# Altium PCB Twintig-USB.PcbDoc
Units mm, origin at the board's own origin, x right, y up, seen from the top; angles counter-clockwise.
Board outline 15 x 20 mm, 4 copper layers (Top Layer, Int1 (GND), Int2 (PWR), Bottom Layer), stack 1.369 mm thick; 20 components, 19 nets, 79 pads, 42 vias.
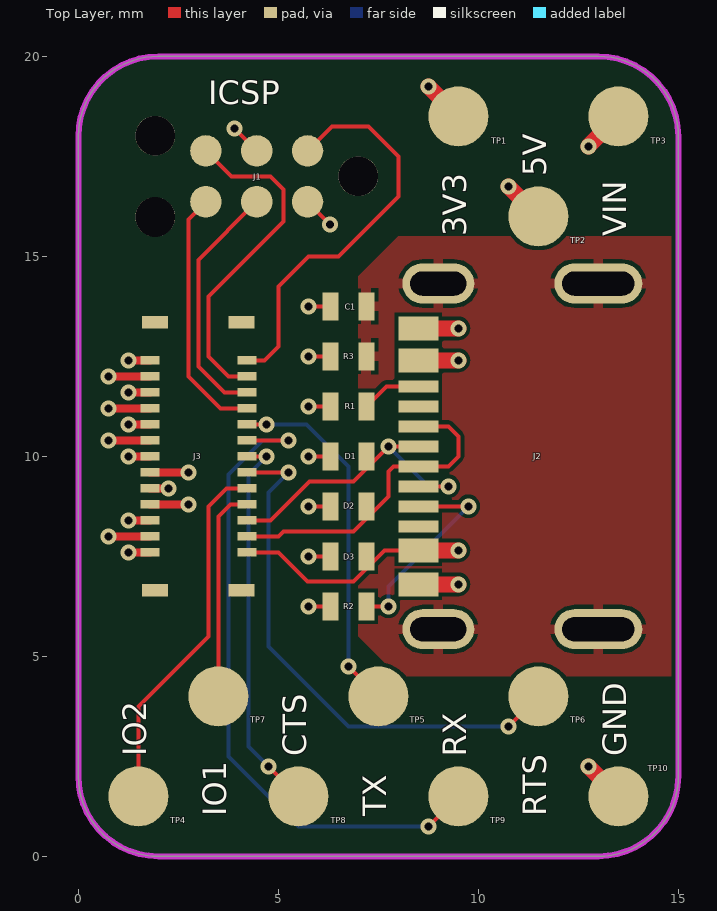
[diagram p0: Top Layer view]
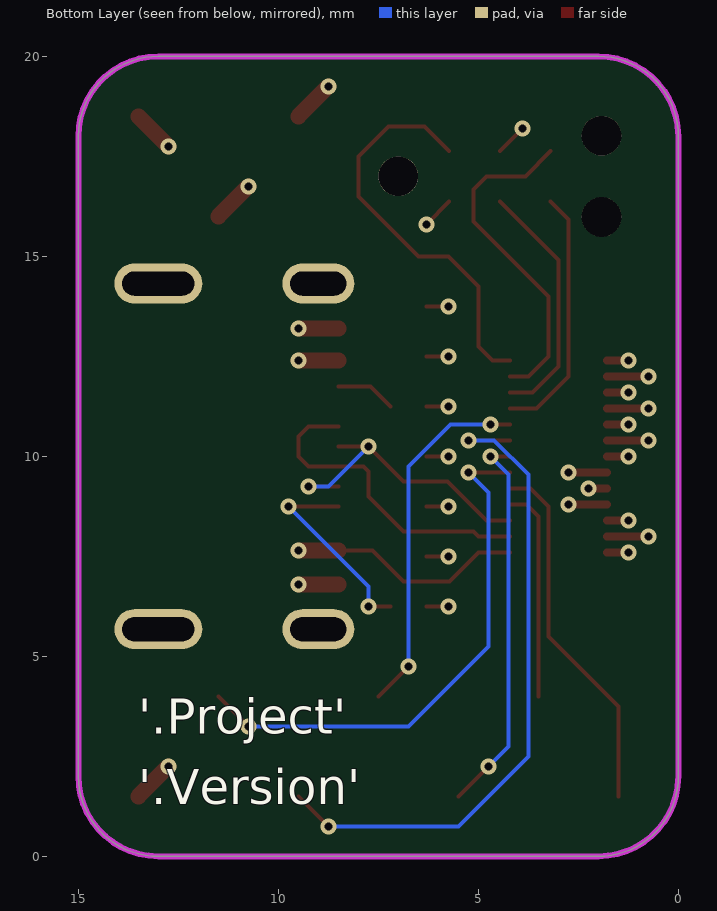
[diagram p1: Bottom Layer view, seen from below]
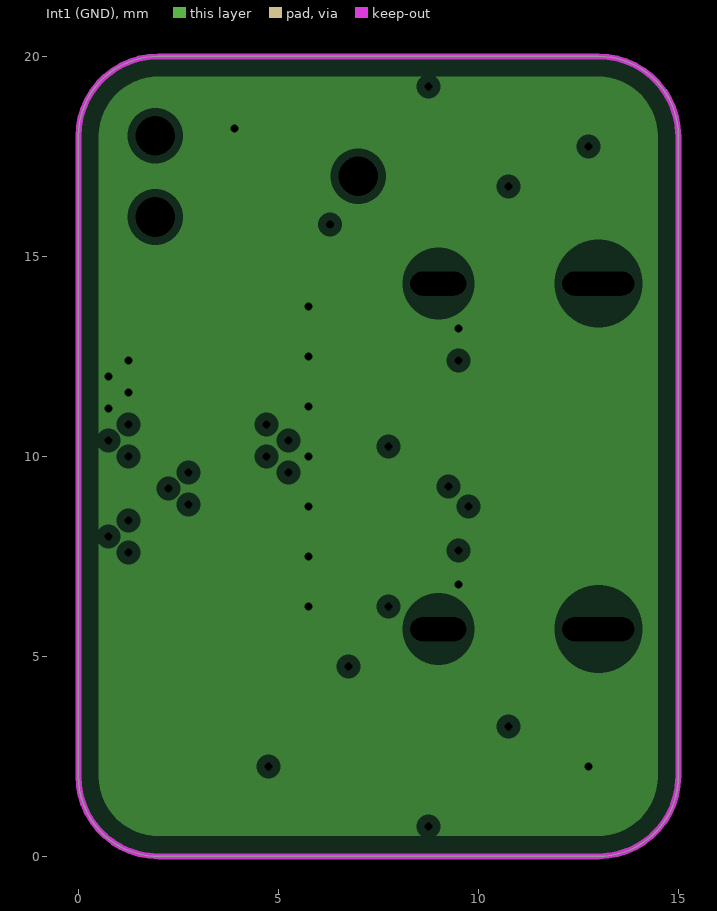
[diagram p2: Int1 (GND), clearances drawn from the general rule]
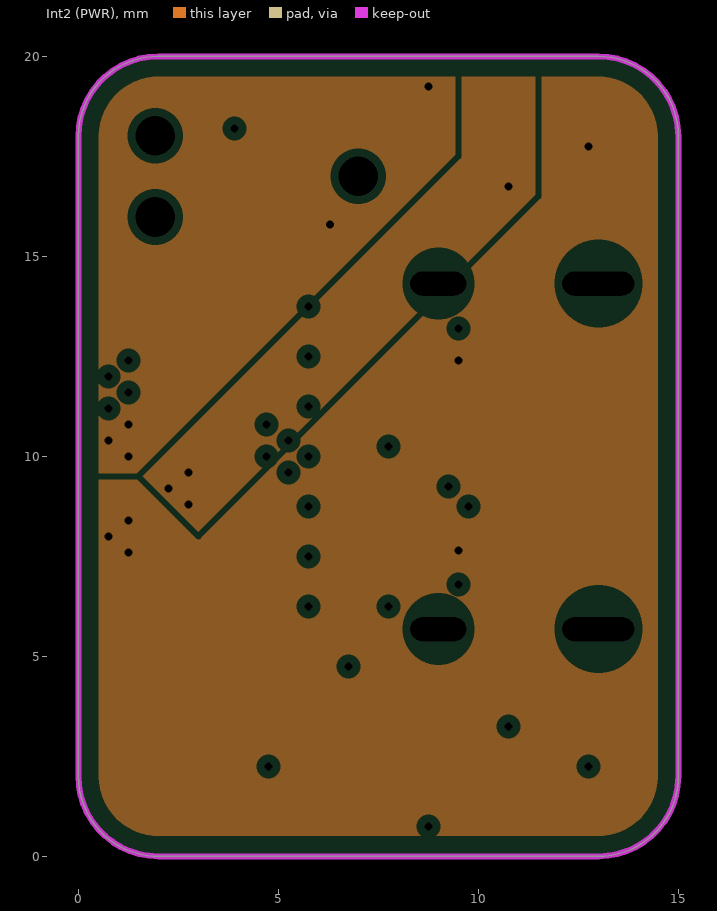
[diagram p3: Int2 (PWR), clearances drawn from the general rule]
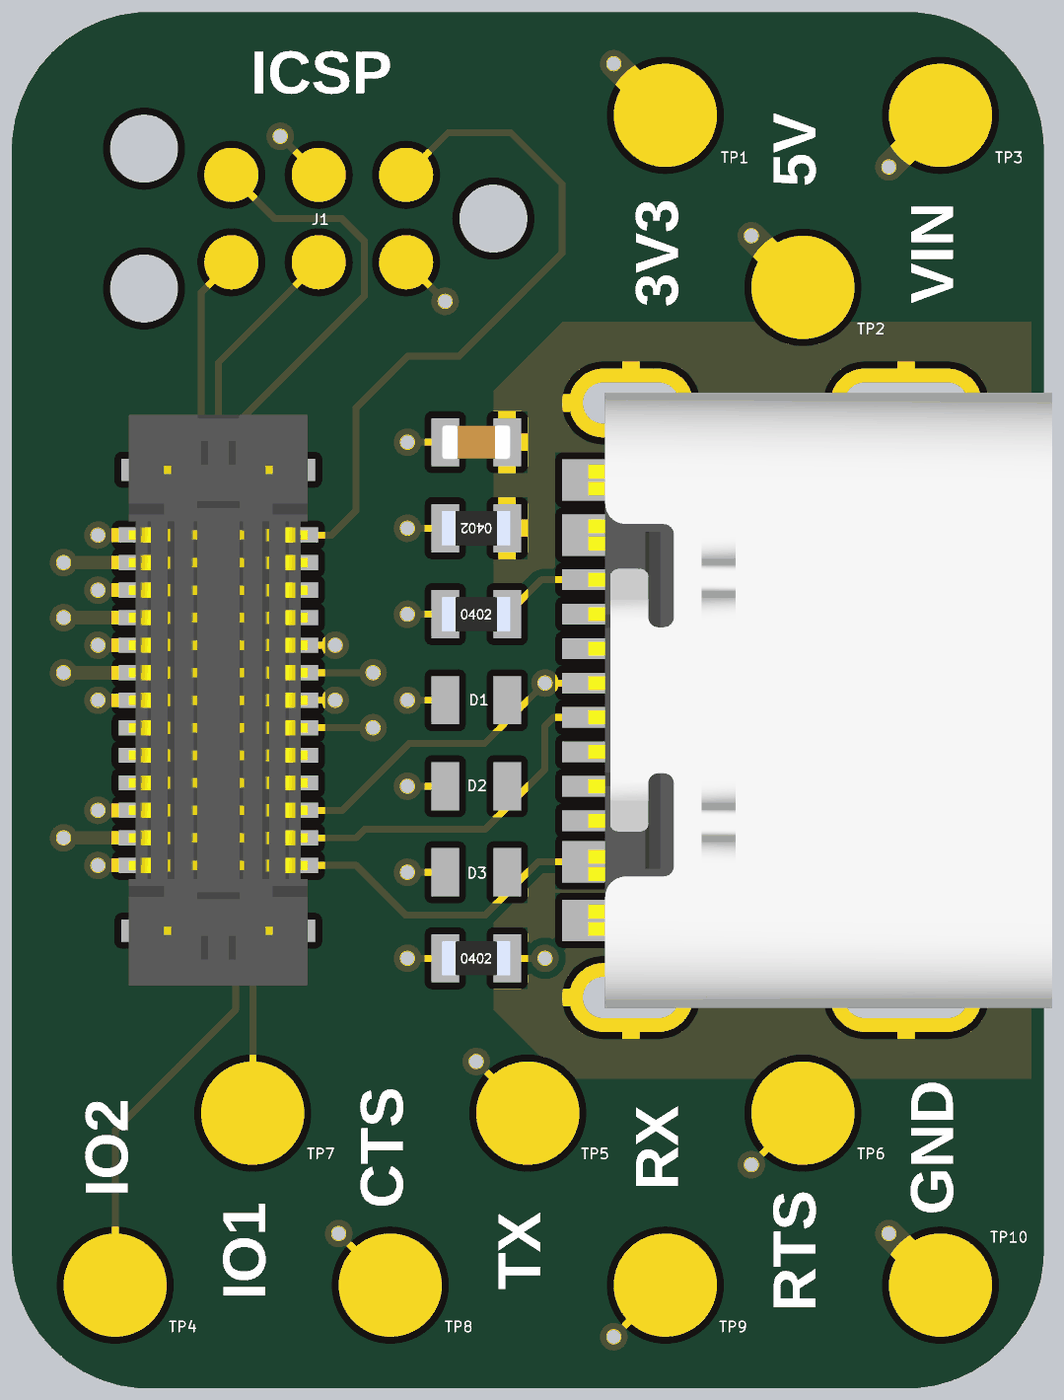
[diagram p4: 3D render of the assembled board from above, using the file's embedded part models]

## Layer stack, top to bottom
Top Solder: solder mask 0.0254, SM-001, Dk 4
Top Layer: signal copper 0.035
Dielectric 1: prepreg 0.1295, PP-017, Dk 4.3
Dielectric 2: prepreg 0.1295, PP-017, Dk 4.3
Int1 (GND): plane copper 0.035, net GND
Dielectric 3: core 0.7112, Core-039, Dk 4.8
Int2 (PWR): plane copper 0.035, net VIN
Dielectric 4: prepreg 0.1295, PP-017, Dk 4.3
Dielectric 5: prepreg 0.1295, PP-017, Dk 4.3
Bottom Layer: signal copper 0.035
Bottom Solder: solder mask 0.0254, SM-001, Dk 4

## Board outline
2,0 cw(c2,2) 0,2 0,18 cw(c2,18) 2,20 13,20 cw(c13,18) 15,18 15,2 cw(c13,2) 13,0

## Design rules (kind name [scope] priority, off if disabled: settings)
Clearance [All] p1: gap=0.1 ignorepadtopadclearanceinfootprint=FALSE except(0: Arc-Hole Track-Hole SMDPad-Hole THPad-Hole Via-Hole Fill-Hole Poly-Hole Region-Hole Text-Hole)
DiffPairsRouting [All] p1: maxlimit=0.254 minlimit=0.1 mostfreqgap=0.1 toplayer_minwidth=0.1 toplayer_maxwidth=0.381 toplayer_prefwidth=0.1 bottomlayer_minwidth=0.1 bottomlayer_maxwidth=0.381 bottomlayer_prefwidth=0.1 maxuncoupledlength=12.7
HoleSize [All] p1: absolutevalues=TRUE maxlimit=10 minlimit=0.025 maxpercent=80.000 minpercent=20.000
MinimumSolderMaskSliver [All] p1: minsoldermaskwidth=0
PlaneClearance [All] p1: clearance=0.2
PlaneConnect [All] p1: planeconnectstyle=Direct reliefexpansion=0.508 reliefentries=4 reliefconductorwidth=0.254 reliefairgap=0.254
PolygonConnect [All] p1: thpad.connectstyle=Relief thpad.reliefconductorwidth=0.254 thpad.reliefentries=4 thpad.polygonreliefangle="90 Angle" thpad.airgapwidth=0.1 smdpad.connectstyle=Relief smdpad.reliefconductorwidth=0.254 smdpad.reliefentries=4 smdpad.polygonreliefangle="90 Angle" smdpad.airgapwidth=0.1 via.connectstyle=Direct via.reliefconductorwidth=0.254 via.reliefentries=4 via.polygonreliefangle="90 Angle" via.airgapwidth=0.254
RoutingVias [All] p1: holewidth=0.711 width=1.27 viastyle="Through Hole" minholewidth=0.15 minwidth=0.35 maxholewidth=0.711 maxwidth=1.27
SilkToSolderMaskClearance [IsPad] p1: minsilkscreentomaskgap=0.1 clearancetoexposedcopper=TRUE
SolderMaskExpansion [All] p1: expansion=0.102 istentingtop=FALSE
SupplyNets "Schematic Supply Nets_4" [InNet('3.3V')] p1: voltage=0.000
SupplyNets "Schematic Supply Nets_3" [InNet('VIN')] p2: voltage=0.000
SupplyNets "Schematic Supply Nets_2" [InNet('GND')] p3: voltage=0.000
SupplyNets "Schematic Supply Nets_1" [InNet('5V')] p4: voltage=0.000
SupplyNets "Schematic Supply Nets" [InNet('SHELL')] p5: voltage=0.000
Width [All] p1: maxlimit=1 minlimit=0.05 preferedwidth=0.1
24 further rules are at their usual default settings.

## Classes and differential pairs
differential pair D: +D_P -D_N

## Components (designator, comment, footprint, x,y, rotation, side; value= is the part's Value field where it differs from the comment)
C1 "4.7nF" "CAPACITOR 0402" 6.75,13.75 r180 top
D1 "SP0402B-ULC-01ETG" "DIODE TVS 0402" 6.75,10 r180 top
D2 "SP0402B-ULC-01ETG" "DIODE TVS 0402" 6.75,8.75 r180 top
D3 "SP0402B-ULC-01ETG" "DIODE TVS 0402" 6.75,7.5 r180 top
J1 "DNP" "TAG CONNECT NO LEGS" 7,17 r180 top
J2 "Molex 217179-0001" "MOLEX 217179-0001" 13,10 r90 top
J3 "Molex 502426-2630" "MOLEX 502426-2630" 3,10 r270 top
R1 "5.1kR" "RESISTOR 0402" 6.75,11.25 r0 top
R2 "5.1kR" "RESISTOR 0402" 6.75,6.25 r0 top
R3 "1MR" "RESISTOR 0402" 6.75,12.5 r180 top
TP1 "Test Point" "TEST POINT 1.5MM" 9.5,18.5 r90 top
TP2 "Test Point" "TEST POINT 1.5MM" 11.5,16 r90 top
TP3 "Test Point" "TEST POINT 1.5MM" 13.5,18.5 r90 top
TP4 "Test Point" "TEST POINT 1.5MM" 1.5,1.5 r90 top
TP5 "Test Point" "TEST POINT 1.5MM" 7.5,4 r90 top
TP6 "Test Point" "TEST POINT 1.5MM" 11.5,4 r90 top
TP7 "Test Point" "TEST POINT 1.5MM" 3.5,4 r90 top
TP8 "Test Point" "TEST POINT 1.5MM" 5.5,1.5 r90 top
TP9 "Test Point" "TEST POINT 1.5MM" 9.5,1.5 r90 top
TP10 "Test Point" "TEST POINT 1.5MM" 13.5,1.5 r90 top

## Footprints (in the part's own frame and the unit in brackets; to place one, negate y for a bottom-side part, rotate by r counter-clockwise, add the part's x,y. Pads: shape width x height; smd on the part's side, far side on the other; paste and mask are expansions set on the pad)
"CAPACITOR 0402" [mm]
  rect 0.4x0.7 smd: 1(-0.45,0) 2(0.45,0)
  body extent -0.5,-0.25 0.5,0.25, height 0.48
"DIODE TVS 0402" [mm]
  rect 0.4x0.7 smd: 1(-0.45,0) 2(0.45,0)
  body extent -0.5,-0.3 0.5,0.3, height 0.4
"MOLEX 217179-0001" [mm]
  rect 0.6x1 smd: "A1 B12"(-3.2,4.5) "A4 B9"(-2.35,4.5) "B1 A12"(3.2,4.5) "B4 A9"(2.4,4.5)
  rect 0.3x1 smd: A5(-1.25,4.5) A6(-0.25,4.5) A7(0.25,4.5) A8(1.25,4.5) B5(1.75,4.5) B6(0.75,4.5) B7(-0.75,4.5) B8(-1.75,4.5)
  oval 1x2.2 hole 0.6 slot 1.8 at 90 deg: Shell(-4.32,0) Shell(4.32,0)
  oval 1x1.8 hole 0.6 slot 1.4 at 90 deg: Shell(-4.32,4) Shell(4.32,4)
  body extent -4.47,-2.13 4.47,4.63, height 3.27
"MOLEX 502426-2630" [mm]
  rect 0.22x0.475 smd: 1(-2.4,-1.212) 2(-2,-1.212) 3(-1.6,-1.212) 4(-1.2,-1.212) 5(-0.8,-1.212) 6(-0.4,-1.212) 7(0,-1.212) 8(0.4,-1.212) 9(0.8,-1.212) 10(1.2,-1.212) 11(1.6,-1.212) 12(2,-1.212) 13(2.4,-1.212) 14(-2.4,1.212) 15(-2,1.212) 16(-1.6,1.212) 17(-1.2,1.212) 18(-0.8,1.212) 19(-0.4,1.212) 20(0,1.212) 21(0.4,1.212) 22(0.8,1.212) 23(1.2,1.212) 24(1.6,1.212) 25(2,1.212) 26(2.4,1.212)
  rect 0.32x0.65 smd: Nail(-3.35,-1.085) Nail(-3.35,1.085) Nail(3.35,-1.085) Nail(3.35,1.085)
  body extent -4.15,-1.3 4.15,1.3, height 0.98
"RESISTOR 0402" [mm]
  rect 0.4x0.7 smd: 1(-0.45,0) 2(0.45,0)
  body extent -0.5,-0.25 0.5,0.25, height 0.34
"TAG CONNECT NO LEGS" [mil]
  round 31 smd paste-99999: 1(50,-25) 2(50,25) 3(100,-25) 4(100,25) 5(150,-25) 6(150,25)
  round 39 hole 39 unplated: Pin(0,0) Pin(200,-40) Pin(200,40)
"TEST POINT 1.5MM" [mm]
  round 1.5 smd paste-100: 1(0,0)

## Part data
C1: library part Capacitor
D1 D2 D3: library part "Diode TVS"
J1: library part "MPLAB ICSP"
J2: library part "USB-C Receptacle (16 Pin)"
R1 R2 R3: library part Resistor

## Via types
v1: diameter 0.4, hole 0.2, Top Layer to Bottom Layer, tented both sides, 42 vias

## Nets (pads, with @x,y where several pads share a name; then routed paths per layer and width w, separated by ;. In a path a pad name is that pad's centre, name@x,y a point inside that pad or via, vN(x,y) a via of type N, cw(c..) or ccw(c..) an arc to the next point about the centre after c; other vN are vias at no path point)
3.3V: J1.2 J3.5 J3.6 J3.7 TP1.1 | length 4
  Top Layer w0.1: J1.2 v1(6.298,15.797)
  Top Layer w0.2: v1(0.75,10.4) J3.6 ; v1(1.25,10) J3.7 ; v1(1.25,10.8) J3.5
  Top Layer w0.4: v1(8.75,19.25) TP1.1
5V: J3.8 J3.9 J3.10 TP2.1 | length 3.4
  Top Layer w0.2: J3.10 v1(2.75,8.8) ; J3.9 v1(2.25,9.2) ; J3.8 v1(2.75,9.6)
  Top Layer w0.4: v1(10.75,16.75) TP2.1
CC1: J2.A5 R2.2 | length 5.1
  Top Layer w0.1: R2.2 v1(7.75,6.25) ; J2.A5 v1(9.75,8.75)
  Bottom Layer w0.1: v1(7.75,6.25) 7.75,6.75 v1(9.75,8.75)
CC2: J2.B5 R1.2 | length 1.5
  Top Layer w0.1: R1.2 7.7,11.75 J2.B5
CTS: J3.20 TP8.1 | length 9.7
  Top Layer w0.1: J3.20 v1(4.7,10) ; v1(4.75,2.25) TP8.1
  Bottom Layer w0.1: v1(4.7,10) 4.25,9.55 4.25,2.75 v1(4.75,2.25)
D_N: D1.1 J2.A7 J2.B7 J3.24 | length 7.7
  Top Layer w0.1: J3.24 4.8,8.4 5.439,9.039 5.775,9.375 6.875,9.375 7.275,9.775 v1(7.75,10.25) J2.A7 ; J2.B7 v1(9.25,9.25)
  Bottom Layer w0.1: v1(7.75,10.25) 8.75,9.25 v1(9.25,9.25)
D_P: D2.1 J2.A6 J2.B6 J3.25 | length 8.1
  Top Layer w0.1: J3.25 5,8 5.125,8.125 6.875,8.125 7.275,8.525 7.75,9 7.75,9.625 7.875,9.75 J2.A6 9.25,9.75 9.5,10 9.5,10.5 9.25,10.75 J2.B6
Debug: J1.6 J3.17 | length 6.3
  Top Layer w0.1: J1.6 2.75,15.925 2.75,12 3.55,11.2 J3.17
GND: "J2.A1 B12" "J2.B1 A12" C1.2 D1.2 D2.2 D3.2 J1.3 J3.1 J3.2 J3.3 J3.4 R1.1 R2.1 R3.2 TP10.1 | length 10.9
  Top Layer w0.1: v1(3.9,18.195) J1.3 ; v1(5.75,6.25) R2.1 ; v1(5.75,7.5) D3.2 ; v1(5.75,8.75) D2.2 ; v1(5.75,10) D1.2 ; v1(5.75,11.25) R1.1 ; v1(5.75,12.5) R3.2 ; v1(5.75,13.75) C1.2
  Top Layer w0.2: v1(0.75,11.2) J3.4 ; v1(0.75,12) J3.2 ; v1(1.25,11.6) J3.3 ; v1(1.25,12.4) J3.1
  Top Layer w0.4: 8.5,6.8 v1(9.5,6.8) ; 8.5,13.2 v1(9.5,13.2) ; v1(12.75,2.25) TP10.1
"GPIO 1": J3.23 TP7.1 | length 5.3
  Top Layer w0.1: TP7.1 3.5,8.5 3.8,8.8 J3.23
"GPIO 2": J3.22 TP4.1 | length 9.1
  Top Layer w0.1: TP4.1 1.5,3.75 3.25,5.5 3.25,8.75 3.7,9.2 J3.22
MCLR: J1.1 J3.14 | length 10.2
  Top Layer w0.1: J3.14 4.65,12.4 5,12.75 5,14.25 5.75,15 6.5,15 8,16.5 8,17.5 7.25,18.25 6.345,18.25 J1.1
PGEC: J1.5 J3.15 | length 8.5
  Top Layer w0.1: J1.5 3.825,17 4.8,17 5.125,16.675 5.125,15.875 3.25,14 3.25,12.5 3.75,12 J3.15
PGED: J1.4 J3.16 | length 6.2
  Top Layer w0.1: J3.16 3.65,11.6 3,12.25 3,14.905 J1.4
RTS: J3.21 TP6.1 | length 13.5
  Top Layer w0.1: J3.21 v1(5.25,9.6) ; v1(10.75,3.25) TP6.1
  Bottom Layer w0.1: v1(5.25,9.6) 4.75,9.1 4.75,5.25 6.75,3.25 v1(10.75,3.25)
RX: J3.19 TP9.1 | length 16.7
  Top Layer w0.1: J3.19 v1(5.25,10.4) ; v1(8.75,0.75) TP9.1
  Bottom Layer w0.1: v1(5.25,10.4) 4.605,10.4 3.75,9.545 3.75,2.5 5.5,0.75 v1(8.75,0.75)
SHELL: C1.1 J2.Shell R3.1
TX: J3.18 TP5.1 | length 9
  Top Layer w0.1: J3.18 v1(4.7,10.8) ; v1(6.75,4.75) TP5.1
  Bottom Layer w0.1: v1(4.7,10.8) 5.7,10.8 6.75,9.75 v1(6.75,4.75)
VIN: "J2.A4 B9" "J2.B4 A9" D3.1 J3.11 J3.12 J3.13 J3.26 TP3.1 | length 10.1
  Top Layer w0.1: J3.26 5,7.6 5.725,6.875 6.875,6.875 7.65,7.65 8.5,7.65
  Top Layer w0.2: v1(0.75,8) J3.12 ; v1(1.25,7.6) J3.13 ; v1(1.25,8.4) J3.11
  Top Layer w0.4: 8.5,7.65 v1(9.5,7.65) ; 8.5,12.4 v1(9.5,12.4) ; v1(12.75,17.75) TP3.1
pads on no net: J1.Pin J2.A8 J2.B8 J3.Nail

## Polygon pours and split planes (outlines as drawn)
SHELL on Top Layer "SHELL_L01_P000" (solid, pour order 0): 15,15.5 8,15.5 7,14.5 7,5.5 8,4.5 15,4.5
GND on Int1 (GND) (split plane): 2,19.49 13,19.49 13.015,19.491 13.167,19.482 13.332,19.454 13.493,19.408 13.647,19.344 13.794,19.263 13.93,19.166 14.055,19.055 14.166,18.93 14.263,18.794 14.344,18.647 14.408,18.493 14.454,18.332 14.482,18.167 14.491,18.015 14.49,18 14.49,2 14.491,1.985 14.482,1.833 14.454,1.668 14.408,1.507 14.344,1.353 14.263,1.206 14.166,1.07 14.055,0.945 13.93,0.834 13.794,0.737 13.647,0.656 13.493,0.592 13.332,0.546 13.167,0.518 13.015,0.509 13,0.51 2,0.51 1.985,0.509 1.833,0.518 1.668,0.546 1.507,0.592 1.353,0.656 1.206,0.737 1.07,0.834 0.945,0.945 0.834,1.07 0.737,1.206 0.656,1.353 0.592,1.507 0.546,1.668 0.518,1.833 0.509,1.985 0.51,2 0.51,18 0.509,18.015 0.518,18.167 0.546,18.332 0.592,18.493 0.656,18.647 0.737,18.794 0.834,18.93 0.945,19.055 1.07,19.166 1.206,19.263 1.353,19.344 1.507,19.408 1.668,19.454 1.833,19.482 1.985,19.491
VIN on Int2 (PWR) (split plane): 13.167,19.482 13.332,19.454 13.493,19.408 13.647,19.344 13.794,19.263 13.93,19.166 14.055,19.055 14.166,18.93 14.263,18.794 14.344,18.647 14.408,18.493 14.454,18.332 14.482,18.167 14.491,18.015 14.49,18 14.49,2 14.491,1.985 14.482,1.833 14.454,1.668 14.408,1.507 14.344,1.353 14.263,1.206 14.166,1.07 14.055,0.945 13.93,0.834 13.794,0.737 13.647,0.656 13.493,0.592 13.332,0.546 13.167,0.518 13.015,0.509 13,0.51 2,0.51 1.985,0.509 1.833,0.518 1.668,0.546 1.507,0.592 1.353,0.656 1.206,0.737 1.07,0.834 0.945,0.945 0.834,1.07 0.737,1.206 0.656,1.353 0.592,1.507 0.546,1.668 0.518,1.833 0.509,1.985 0.51,2 0.51,9.424 1.468,9.424 2.946,7.946 2.971,7.929 3,7.924 3.029,7.929 3.054,7.946 11.554,16.446 11.564,16.461 11.571,16.471 11.576,16.5 11.576,19.49 13,19.49 13.015,19.491
5V on Int2 (PWR) (split plane): 11.424,19.49 11.424,16.532 3,8.108 1.608,9.5 9.554,17.446 9.571,17.471 9.576,17.5 9.576,19.49
3.3V on Int2 (PWR) (split plane): 2,19.49 9.424,19.49 9.424,17.532 1.468,9.576 0.51,9.576 0.51,18 0.509,18.015 0.518,18.167 0.546,18.332 0.592,18.493 0.656,18.647 0.737,18.794 0.834,18.93 0.945,19.055 1.07,19.166 1.206,19.263 1.353,19.344 1.507,19.408 1.668,19.454 1.833,19.482 1.985,19.491

## Keep-outs
Keep-Out Layer:
  the board outline again, w0.15

## Other copper
Int2 (PWR) (plane layer: these items are gaps in the copper):
  lines w0.15: 0,9.5 1.5,9.5 ; 9.5,20 9.5,17.5 1.5,9.5 ; 11.5,20 11.5,16.5 3,8 1.5,9.5

## Silkscreen, mask and mechanical layers (free items; w line width, h text height)
Top Overlay:
  text "ICSP" at 3.25,18.6 h1
  text "5V" at 11.9,17 h1 r90
  text "3V3" at 9.9,15.5 h1 r90
  text "VIN" at 13.9,15.5 h1 r90
  text "IO2" at 1.9,2.5 h1 r90
  text "CTS" at 5.9,2.5 h1 r90
  text "RX" at 9.9,2.493 h1 r90
  text "GND" at 13.9,2.5 h1 r90
  text "IO1" at 3.9,1 h1 r90
  text "TX" at 7.9,1 h1 r90
  text "RTS" at 11.9,1 h1 r90
Bottom Overlay:
  text "'.Project'" at 13.5,2.782 h1.5
  text "'.Version'" at 13.5,1.017 h1.5